# Altium PCB OptoGrid_uLEDArray_V0.05.pcbdoc (part 2 of 2)
Units mil, origin at the board's own origin, x right, y up, seen from the top; angles counter-clockwise.
Board outline 861.98 x 813.48 mil, 2 copper layers (Top Layer, Bottom Layer); 65 components, 16 nets, 148 pads, 64 vias.
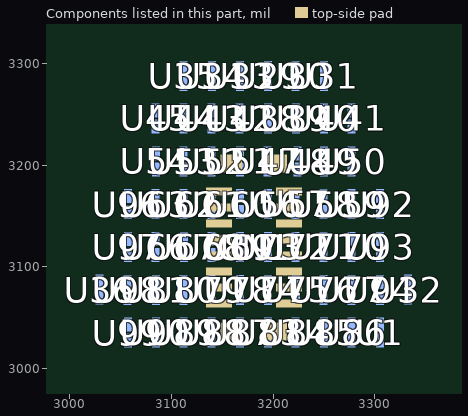
[diagram p2: the components of this part, seen from the top]

## Other copper (continued)
Bottom Layer:
  region net Y8: 3303.47,3051.4 3306.47,3051.4 ccw(c3312.1,3051.4) 3308.72,3046.9 3306.47,3046.9 3303.47,3046.9 3301.22,3046.9 ccw(c3297.85,3051.4)
  region net X8: 3296.24,3025.72 3296.24,3028.72 ccw(c3295.79,3030.97) 3298.08,3030.97 3298.08,3028.72 3298.08,3025.72 3298.08,3023.47 ccw(c3295.79,3023.47)
  region net X8: 3311.87,3028.69 3311.87,3025.69 ccw(c3564.99,3023.44) 3311.86,3023.44 3311.86,3025.69 3311.86,3028.69 3311.86,3030.94 ccw(c3564.99,3030.94)
  region net Y6: 3129.38,3078.17 3130.32,3083.35 ccw(c3123.69,3089.98) 3132.68,3087.35 3132.68,3085.72 3132.68,3081.48 3132.68,3081.23 ccw(c3169.67,3037.88)
  region net Y6: 3148.05,3083.53 3147.71,3079.64 ccw(c3142.93,3073.27) 3142.93,3081.23 3146.12,3081.23 3146.46,3085.12 3146.46,3088.3 ccw(c3154.42,3088.3)
  region net X3: 3141.07,3060.98 3138.07,3060.98 ccw(c3132.45,3060.98) 3135.82,3065.48 3138.07,3065.48 3141.07,3065.48 3143.32,3065.48 ccw(c3146.7,3060.98)
  region net Y6: 3160.43,3074.03 3162.98,3075.72 ccw(c3169.61,3082.34) 3166.98,3073.35 3165.35,3073.35 3161.11,3073.35 3160.28,3073.35 ccw(c3160.14,3073.74)
  region net Y6: 3178.56,3070.91 3178.56,3067.91 ccw(c3178.56,3062.28) 3174.06,3065.66 3174.06,3067.91 3174.06,3070.91 3174.06,3073.16 ccw(c3178.56,3076.53)
  region net Y6: 3095.96,3070.91 3095.96,3067.91 ccw(c3095.96,3062.28) 3091.46,3065.66 3091.46,3067.91 3091.46,3070.91 3091.46,3073.16 ccw(c3095.96,3076.53)
  region net Y6: 3100.58,3067.91 3100.58,3070.91 ccw(c3100.58,3076.53) 3105.08,3073.16 3105.08,3070.91 3105.08,3067.91 3105.08,3065.66 ccw(c3100.58,3062.28)
  region net Y6: 3122.77,3075.81 3120.96,3069.75 ccw(c3126.15,3064.56) 3118.86,3065.48 3118.86,3071.9 3118.86,3073.35 ccw(c3115.43,3083.15)
  region net Y6: 3120.96,3069.09 3121.73,3064.07 ccw(c3118.23,3060.57) 3118.86,3065.48 3118.86,3066.94 3118.86,3073.35 ccw(c3126.17,3074.29)
  region net X2: 3104.53,3093.87 3111.95,3090.69 ccw(c3116.72,3097.06) 3116.72,3089.1 3109.3,3089.1 3106.12,3089.1 ccw(c3100.55,3089.9)
  region net Y6: 3183.38,3067.91 3183.38,3070.91 ccw(c3183.38,3076.53) 3187.88,3073.16 3187.88,3070.91 3187.88,3067.91 3187.88,3065.66 ccw(c3183.38,3062.28)
  region net Y6: 3206.16,3070.89 3206.16,3067.89 ccw(c3206.16,3062.26) 3201.66,3065.64 3201.66,3067.89 3201.66,3070.89 3201.66,3073.14 ccw(c3206.16,3076.51)
  region net Y6: 3233.75,3086.62 3233.78,3083.61 ccw(c3233.74,3077.99) 3229.26,3081.39 3229.26,3083.64 3229.26,3086.64 3229.26,3088.89 ccw(c3233.79,3092.24)
  region net Y6: 3211,3083.77 3210.97,3086.77 ccw(c3211.01,3092.4) 3215.48,3088.99 3215.48,3086.74 3215.48,3083.74 3215.48,3081.49 ccw(c3210.96,3078.14)
  region net X6: 3223.87,3060.98 3220.87,3060.98 ccw(c3215.25,3060.98) 3218.62,3065.48 3220.87,3065.48 3223.87,3065.48 3226.12,3065.48 ccw(c3229.5,3060.98)
  region net Y5: 3095.76,3113 3095.76,3110 ccw(c3095.77,3104.37) 3091.26,3107.74 3091.26,3109.99 3091.26,3112.99 3091.26,3115.24 ccw(c3095.76,3118.62)
  region net Y5: 3100.78,3110 3100.78,3113 ccw(c3100.78,3118.62) 3105.28,3115.25 3105.28,3113 3105.28,3110 3105.28,3107.75 ccw(c3100.79,3104.37)
  region net Y5: 3123.56,3113.01 3123.56,3110.01 ccw(c3123.57,3104.39) 3119.06,3107.76 3119.06,3110.01 3119.06,3113.01 3119.06,3115.26 ccw(c3123.56,3118.64)
  region net Y5: 3128.18,3110.01 3128.18,3113.01 ccw(c3128.18,3118.64) 3132.68,3115.26 3132.68,3113.01 3132.68,3110.01 3132.68,3107.76 ccw(c3128.19,3104.39)
  region net Y5: 3150.96,3113.02 3150.96,3110.02 ccw(c3150.97,3104.4) 3146.46,3107.77 3146.46,3110.02 3146.46,3113.02 3146.46,3115.27 ccw(c3150.96,3118.65)
  region net X3: 3138.07,3135.8 3141.07,3135.8 ccw(c3146.7,3135.8) 3143.32,3131.3 3141.07,3131.3 3138.07,3131.3 3135.82,3131.3 ccw(c3132.45,3135.8)
  region net Y5: 3155.78,3110.03 3155.78,3113.03 ccw(c3155.78,3118.65) 3160.28,3115.28 3160.28,3113.03 3160.28,3110.03 3160.28,3107.78 ccw(c3155.79,3104.4)
  region net Y5: 3178.56,3113.04 3178.56,3110.04 ccw(c3178.57,3104.41) 3174.06,3107.79 3174.06,3110.04 3174.06,3113.04 3174.06,3115.29 ccw(c3178.56,3118.66)
  region net Y5: 3183.38,3110.04 3183.38,3113.04 ccw(c3183.38,3118.67) 3187.88,3115.29 3187.88,3113.04 3187.88,3110.04 3187.88,3107.79 ccw(c3183.39,3104.42)
  region net Y5: 3206.16,3113.05 3206.16,3110.05 ccw(c3206.17,3104.43) 3201.66,3107.8 3201.66,3110.05 3201.66,3113.05 3201.66,3115.3 ccw(c3206.16,3118.68)
  region net Y5: 3215.17,3110.06 3215.17,3113.06 ccw(c3192.38,3115.31) 3215.28,3115.31 3215.28,3113.06 3215.28,3110.06 3215.28,3107.81 ccw(c3192.06,3107.81)
  region net Y5: 3233.56,3113.07 3233.56,3110.07 ccw(c3233.57,3104.44) 3229.06,3107.81 3229.06,3110.06 3229.06,3113.06 3229.06,3115.31 ccw(c3233.56,3118.69)
  region net X6: 3220.67,3135.8 3223.67,3135.8 ccw(c3229.3,3135.8) 3225.92,3131.3 3223.67,3131.3 3220.67,3131.3 3218.42,3131.3 ccw(c3215.05,3135.8)
  region net Y5: 3265.98,3110.08 3265.98,3113.08 ccw(c3265.98,3118.71) 3270.48,3115.34 3270.48,3113.09 3270.48,3110.09 3270.48,3107.84 ccw(c3265.99,3104.46)
  region net Y5: 3238.38,3110.07 3238.38,3113.07 ccw(c3238.38,3118.69) 3242.88,3115.32 3242.88,3113.07 3242.88,3110.07 3242.88,3107.82 ccw(c3238.39,3104.44)
  region net Y5: 3261.16,3113.08 3261.16,3110.08 ccw(c3261.17,3104.46) 3256.66,3107.83 3256.66,3110.08 3256.66,3113.08 3256.66,3115.33 ccw(c3261.16,3118.71)
  region net Y4: 3095.84,3155.21 3095.87,3152.21 ccw(c3095.83,3146.58) 3091.35,3149.99 3091.35,3152.24 3091.35,3155.24 3091.35,3157.49 ccw(c3095.88,3160.83)
  region net X1: 3084.75,3174.9 3092.71,3178.2 ccw(c3096.54,3174.08) 3090.95,3173.49 3087.64,3173.49 3079.93,3173.49 ccw(c3079.93,3182.45)
  region net Y4: 3100.6,3152.17 3100.57,3155.17 ccw(c3100.61,3160.8) 3105.08,3157.39 3105.08,3155.14 3105.08,3152.14 3105.08,3149.89 ccw(c3100.56,3146.55)
  region net Y4: 3119.11,3159.14 3120.45,3156.25 ccw(c3126.82,3151.48) 3118.86,3151.48 3118.86,3154.66 3117.52,3157.55 3114.33,3157.55 ccw(c3114.33,3165.51)
  region net Y4: 3150.96,3170.87 3150.96,3167.87 ccw(c3150.96,3162.24) 3146.46,3165.62 3146.46,3167.87 3146.46,3170.87 3146.46,3173.12 ccw(c3150.96,3176.49)
  region net Y4: 3131.47,3167.89 3131.47,3170.89 ccw(c3129.99,3173.14) 3132.68,3173.14 3132.68,3170.89 3132.68,3167.89 3132.68,3165.64 ccw(c3129.99,3165.64)
  region net X3: 3141.07,3145.18 3138.07,3145.18 ccw(c3132.45,3145.18) 3135.82,3149.68 3138.07,3149.68 3141.07,3149.68 3143.32,3149.68 ccw(c3146.7,3145.18)
  region net Y3: 3095.96,3197.31 3095.96,3194.31 ccw(c3095.96,3188.68) 3091.46,3192.06 3091.46,3194.31 3091.46,3197.31 3091.46,3199.56 ccw(c3095.96,3202.93)
  region net Y3: 3100.58,3194.31 3100.58,3197.31 ccw(c3100.58,3202.93) 3105.08,3199.56 3105.08,3197.31 3105.08,3194.31 3105.08,3192.06 ccw(c3100.58,3188.68)
  region net Y3: 3123.36,3197.31 3123.36,3194.31 ccw(c3123.36,3188.68) 3118.86,3192.06 3118.86,3194.31 3118.86,3197.31 3118.86,3199.56 ccw(c3123.36,3202.93)
  region net Y3: 3150.85,3197.31 3150.85,3194.31 ccw(c3150.85,3188.68) 3146.35,3192.06 3146.35,3194.31 3146.35,3197.31 3146.35,3199.56 ccw(c3150.85,3202.93)
  region net Y3: 3128.07,3194.31 3128.07,3197.31 ccw(c3128.07,3202.93) 3132.57,3199.56 3132.57,3197.31 3132.57,3194.31 3132.57,3192.06 ccw(c3128.07,3188.68)
  region net Y1: 3107.52,3273.71 3102.18,3272.62 ccw(c3083.89,3290.91) 3105.08,3276.08 3105.64,3276.08 3109.88,3276.08 3111.51,3276.08 ccw(c3114.14,3267.09)
  region net Y1: 3123.36,3281.51 3123.36,3278.51 ccw(c3123.36,3272.88) 3118.86,3276.26 3118.86,3278.51 3118.86,3281.51 3118.86,3283.76 ccw(c3123.36,3287.13)
  region net Y1: 3128.25,3278.51 3128.25,3281.51 ccw(c3128.25,3287.13) 3132.75,3283.76 3132.75,3281.51 3132.75,3278.51 3132.75,3276.26 ccw(c3128.25,3272.88)
  region net Y1: 3151.03,3281.51 3151.03,3278.51 ccw(c3151.03,3272.88) 3146.53,3276.26 3146.53,3278.51 3146.53,3281.51 3146.53,3283.76 ccw(c3151.03,3287.13)
  region net Y1: 3178.58,3281.51 3178.58,3278.51 ccw(c3178.58,3272.88) 3174.08,3276.26 3174.08,3278.51 3174.08,3281.51 3174.08,3283.76 ccw(c3178.58,3287.13)
  region net Y1: 3155.8,3278.51 3155.8,3281.51 ccw(c3155.8,3287.13) 3160.3,3283.76 3160.3,3281.51 3160.3,3278.51 3160.3,3276.26 ccw(c3155.8,3272.88)
  region net Y1: 3183.36,3278.51 3183.36,3281.51 ccw(c3183.36,3287.13) 3187.86,3283.76 3187.86,3281.51 3187.86,3278.51 3187.86,3276.26 ccw(c3183.36,3272.88)
  region net Y1: 3206.14,3281.51 3206.14,3278.51 ccw(c3206.14,3272.88) 3201.64,3276.26 3201.64,3278.51 3201.64,3281.51 3201.64,3283.76 ccw(c3206.14,3287.13)
  region net Y1: 3210.84,3278.51 3210.84,3281.51 ccw(c3210.84,3287.13) 3215.34,3283.76 3215.34,3281.51 3215.34,3278.51 3215.34,3276.26 ccw(c3210.84,3272.88)
  region net Y1: 3233.62,3281.51 3233.62,3278.51 ccw(c3233.62,3272.88) 3229.12,3276.26 3229.12,3278.51 3229.12,3281.51 3229.12,3283.76 ccw(c3233.62,3287.13)
  region net Y1: 3238.58,3278.51 3238.58,3281.51 ccw(c3238.58,3287.13) 3243.08,3283.76 3243.08,3281.51 3243.08,3278.51 3243.08,3276.26 ccw(c3238.58,3272.88)
  region net Y2: 3095.86,3239.51 3095.86,3236.51 ccw(c3095.86,3230.88) 3091.36,3234.26 3091.36,3236.51 3091.36,3239.51 3091.36,3241.76 ccw(c3095.86,3245.13)
  region net Y2: 3100.58,3236.51 3100.58,3239.51 ccw(c3100.58,3245.13) 3105.08,3241.76 3105.08,3239.51 3105.08,3236.51 3105.08,3234.26 ccw(c3100.58,3230.88)
  region net Y2: 3123.36,3239.51 3123.36,3236.51 ccw(c3123.36,3230.88) 3118.86,3234.26 3118.86,3236.51 3118.86,3239.51 3118.86,3241.76 ccw(c3123.36,3245.13)
  region net Y2: 3128.08,3236.51 3128.08,3239.51 ccw(c3128.08,3245.13) 3132.58,3241.76 3132.58,3239.51 3132.58,3236.51 3132.58,3234.26 ccw(c3128.08,3230.88)
  region net Y2: 3150.86,3239.51 3150.86,3236.51 ccw(c3150.86,3230.88) 3146.36,3234.26 3146.36,3236.51 3146.36,3239.51 3146.36,3241.76 ccw(c3150.86,3245.13)
  region net Y2: 3178.36,3239.51 3178.36,3236.51 ccw(c3178.36,3230.88) 3173.86,3234.26 3173.86,3236.51 3173.86,3239.51 3173.86,3241.76 ccw(c3178.36,3245.13)
  region net Y2: 3155.58,3236.51 3155.58,3239.51 ccw(c3155.58,3245.13) 3160.08,3241.76 3160.08,3239.51 3160.08,3236.51 3160.08,3234.26 ccw(c3155.58,3230.88)
  region net Y2: 3183.38,3236.51 3183.38,3239.51 ccw(c3183.38,3245.13) 3187.88,3241.76 3187.88,3239.51 3187.88,3236.51 3187.88,3234.26 ccw(c3183.38,3230.88)
  region net Y2: 3206.16,3239.51 3206.16,3236.51 ccw(c3206.16,3230.88) 3201.66,3234.26 3201.66,3236.51 3201.66,3239.51 3201.66,3241.76 ccw(c3206.16,3245.13)
  region net Y2: 3238.58,3236.51 3238.58,3239.51 ccw(c3238.58,3245.13) 3243.08,3241.76 3243.08,3239.51 3243.08,3236.51 3243.08,3234.26 ccw(c3238.58,3230.88)
  region net Y2: 3261.36,3239.51 3261.36,3236.51 ccw(c3261.36,3230.88) 3256.86,3234.26 3256.86,3236.51 3256.86,3239.51 3256.86,3241.76 ccw(c3261.36,3245.13)
  region net Y2: 3210.98,3236.51 3210.98,3239.51 ccw(c3210.98,3245.13) 3215.48,3241.76 3215.48,3239.51 3215.48,3236.51 3215.48,3234.26 ccw(c3210.98,3230.88)
  region net Y2: 3233.76,3239.51 3233.76,3236.51 ccw(c3233.76,3230.88) 3229.26,3234.26 3229.26,3236.51 3229.26,3239.51 3229.26,3241.76 ccw(c3233.76,3245.13)
  region net X6: 3226.56,3260.07 3232.03,3261.3 ccw(c3244.47,3248.86) 3229.26,3257.7 3228.44,3257.7 3224.19,3257.7 3222.56,3257.7 ccw(c3219.94,3266.69)
  region net Y2: 3265.98,3236.51 3265.98,3239.51 ccw(c3265.98,3245.13) 3270.48,3241.76 3270.48,3239.51 3270.48,3236.51 3270.48,3234.26 ccw(c3265.98,3230.88)
  region net Y3: 3155.78,3194.31 3155.78,3197.31 ccw(c3155.78,3202.93) 3160.28,3199.56 3160.28,3197.31 3160.28,3194.31 3160.28,3192.06 ccw(c3155.78,3188.68)
  region net Y3: 3178.56,3197.31 3178.56,3194.31 ccw(c3178.56,3188.68) 3174.06,3192.06 3174.06,3194.31 3174.06,3197.31 3174.06,3199.56 ccw(c3178.56,3202.93)
  region net X4: 3165.79,3220 3168.79,3220 ccw(c3174.42,3220) 3171.04,3215.5 3168.79,3215.5 3165.79,3215.5 3163.54,3215.5 ccw(c3160.17,3220)
  region net Y3: 3183.07,3194.31 3183.07,3197.31 ccw(c3183.07,3202.93) 3187.57,3199.56 3187.57,3197.31 3187.57,3194.31 3187.57,3192.06 ccw(c3183.07,3188.68)
  region net Y3: 3205.85,3197.31 3205.85,3194.31 ccw(c3205.85,3188.68) 3201.35,3192.06 3201.35,3194.31 3201.35,3197.31 3201.35,3199.56 ccw(c3205.85,3202.93)
  region net Y3: 3235.37,3197.31 3235.37,3194.31 ccw(c3235.37,3188.68) 3230.87,3192.06 3230.87,3194.31 3230.87,3197.31 3230.87,3199.56 ccw(c3235.37,3202.93)
  region net Y3: 3212.59,3194.31 3212.59,3197.31 ccw(c3212.59,3202.93) 3217.09,3199.56 3217.09,3197.31 3217.09,3194.31 3217.09,3192.06 ccw(c3212.59,3188.68)
  region net Y3: 3238.47,3194.31 3238.47,3197.31 ccw(c3238.47,3202.93) 3242.97,3199.56 3242.97,3197.31 3242.97,3194.31 3242.97,3192.06 ccw(c3238.47,3188.68)
  region net Y3: 3261.25,3197.31 3261.25,3194.31 ccw(c3261.25,3188.68) 3256.75,3192.06 3256.75,3194.31 3256.75,3197.31 3256.75,3199.56 ccw(c3261.25,3202.93)
  region net Y3: 3265.98,3194.31 3265.98,3197.31 ccw(c3265.98,3202.93) 3270.48,3199.56 3270.48,3197.31 3270.48,3194.31 3270.48,3192.06 ccw(c3265.98,3188.68)
  region net Y4: 3155.78,3167.87 3155.78,3170.87 ccw(c3155.78,3176.49) 3160.28,3173.12 3160.28,3170.87 3160.28,3167.87 3160.28,3165.62 ccw(c3155.78,3162.24)
  region net X4: 3176.1,3155.12 3176.1,3152.12 ccw(c3176.32,3149.87) 3174.06,3149.87 3174.06,3152.12 3174.06,3155.12 3174.06,3157.37 ccw(c3176.32,3157.37)
  region net Y4: 3233.55,3171.01 3233.58,3168.01 ccw(c3233.54,3162.38) 3229.06,3165.79 3229.06,3168.04 3229.06,3171.04 3229.06,3173.29 ccw(c3233.59,3176.63)
  region net Y4: 3210.8,3168.18 3210.77,3171.18 ccw(c3210.81,3176.81) 3215.28,3173.4 3215.28,3171.15 3215.28,3168.15 3215.28,3165.9 ccw(c3210.76,3162.56)
  region net X6: 3223.67,3145.38 3220.67,3145.38 ccw(c3215.05,3145.38) 3218.42,3149.88 3220.67,3149.88 3223.67,3149.88 3225.92,3149.88 ccw(c3229.3,3145.38)
  region net Y4: 3238.4,3167.97 3238.37,3170.97 ccw(c3238.41,3176.6) 3242.88,3173.19 3242.88,3170.94 3242.88,3167.94 3242.88,3165.69 ccw(c3238.36,3162.35)
  region net Y4: 3261.16,3170.89 3261.16,3167.89 ccw(c3261.16,3162.26) 3256.66,3165.64 3256.66,3167.89 3256.66,3170.89 3256.66,3173.14 ccw(c3261.16,3176.51)
  region net Y4: 3266,3152.17 3265.97,3155.17 ccw(c3266.01,3160.8) 3270.48,3157.39 3270.48,3155.14 3270.48,3152.14 3270.48,3149.89 ccw(c3265.96,3146.55)
  region net Y4: 3196.27,3149.49 3193.27,3149.49 ccw(c3191.02,3136.19) 3191.02,3149.68 3193.27,3149.68 3196.27,3149.68 3198.52,3149.68 ccw(c3198.52,3136.19)
  region net Y4: 3200.71,3159.14 3203.25,3157.45 ccw(c3209.62,3152.68) 3201.66,3152.68 3201.66,3155.86 3199.12,3157.55 3195.93,3157.55 ccw(c3195.93,3165.51)
  region net X5: 3191.23,3177.24 3194.23,3177.24 ccw(c3198.81,3177.24) 3196.48,3173.3 3194.23,3173.3 3191.23,3173.3 3188.98,3173.3 ccw(c3186.65,3177.24)
  region net Y6: 3238.38,3067.89 3238.38,3070.89 ccw(c3238.38,3076.51) 3242.88,3073.14 3242.88,3070.89 3242.88,3067.89 3242.88,3065.64 ccw(c3238.38,3062.26)
  region net Y6: 3261.16,3070.91 3261.16,3067.91 ccw(c3261.16,3062.28) 3256.66,3065.66 3256.66,3067.91 3256.66,3070.91 3256.66,3073.16 ccw(c3261.16,3076.53)
  region net Y6: 3265.98,3067.91 3265.98,3070.91 ccw(c3265.98,3076.53) 3270.48,3073.16 3270.48,3070.91 3270.48,3067.91 3270.48,3065.66 ccw(c3265.98,3062.28)
  region net Y7: 3095.96,3028.91 3095.96,3025.91 ccw(c3095.96,3020.28) 3091.46,3023.66 3091.46,3025.91 3091.46,3028.91 3091.46,3031.16 ccw(c3095.96,3034.53)
  region net X1: 3078.44,3037.64 3076.09,3039.53 ccw(c3069.73,3044.3) 3077.68,3044.3 3077.68,3041.12 3080.03,3039.23 3083.21,3039.23 ccw(c3083.21,3031.27)
  region net Y7: 3100.58,3025.91 3100.58,3028.91 ccw(c3100.58,3034.53) 3105.08,3031.16 3105.08,3028.91 3105.08,3025.91 3105.08,3023.66 ccw(c3100.58,3020.28)
  region net Y7: 3123.36,3028.91 3123.36,3025.91 ccw(c3123.36,3020.28) 3118.86,3023.66 3118.86,3025.91 3118.86,3028.91 3118.86,3031.16 ccw(c3123.36,3034.53)
  region net Y7: 3150.96,3028.91 3150.96,3025.91 ccw(c3150.96,3020.28) 3146.46,3023.66 3146.46,3025.91 3146.46,3028.91 3146.46,3031.16 ccw(c3150.96,3034.53)
  region net Y7: 3128.18,3025.91 3128.18,3028.91 ccw(c3128.18,3034.53) 3132.68,3031.16 3132.68,3028.91 3132.68,3025.91 3132.68,3023.66 ccw(c3128.18,3020.28)
  region net X3: 3138.07,3051.6 3141.07,3051.6 ccw(c3146.7,3051.6) 3143.32,3047.1 3141.07,3047.1 3138.07,3047.1 3135.82,3047.1 ccw(c3132.45,3051.6)
  region net Y7: 3155.78,3025.91 3155.78,3028.91 ccw(c3155.78,3034.53) 3160.28,3031.16 3160.28,3028.91 3160.28,3025.91 3160.28,3023.66 ccw(c3155.78,3020.28)
  region net Y7: 3178.56,3028.91 3178.56,3025.91 ccw(c3178.56,3020.28) 3174.06,3023.66 3174.06,3025.91 3174.06,3028.91 3174.06,3031.16 ccw(c3178.56,3034.53)
  region net Y7: 3157.86,3029.42 3156.97,3034.4 ccw(c3257.82,3140.59) 3160.28,3031.35 3160.28,3031.26 3160.28,3027.12 3160.28,3025.44 ccw(c3151.72,3022.96)
  region net Y7: 3183.38,3025.91 3183.38,3028.91 ccw(c3183.38,3034.53) 3187.88,3031.16 3187.88,3028.91 3187.88,3025.91 3187.88,3023.66 ccw(c3183.38,3020.28)
  region net Y7: 3206.16,3028.91 3206.16,3025.91 ccw(c3206.16,3020.28) 3201.66,3023.66 3201.66,3025.91 3201.66,3028.91 3201.66,3031.16 ccw(c3206.16,3034.53)
  region net Y7: 3210.78,3025.91 3210.78,3028.91 ccw(c3210.78,3034.53) 3215.28,3031.16 3215.28,3028.91 3215.28,3025.91 3215.28,3023.66 ccw(c3210.78,3020.28)
  region net Y7: 3233.56,3028.91 3233.56,3025.91 ccw(c3233.56,3020.28) 3229.06,3023.66 3229.06,3025.91 3229.06,3028.91 3229.06,3031.16 ccw(c3233.56,3034.53)
  region net X6: 3220.87,3051.6 3223.87,3051.6 ccw(c3229.5,3051.6) 3226.12,3047.1 3223.87,3047.1 3220.87,3047.1 3218.62,3047.1 ccw(c3215.25,3051.6)
  region net Y7: 3238.58,3025.91 3238.58,3028.91 ccw(c3238.58,3034.53) 3243.08,3031.16 3243.08,3028.91 3243.08,3025.91 3243.08,3023.66 ccw(c3238.58,3020.28)
  region net Y7: 3261.36,3028.91 3261.36,3025.91 ccw(c3261.36,3020.28) 3256.86,3023.66 3256.86,3025.91 3256.86,3028.91 3256.86,3031.16 ccw(c3261.36,3034.53)
  region net X7: 3254.16,3049.47 3259.63,3050.7 ccw(c3272.07,3038.26) 3256.86,3047.1 3256.04,3047.1 3251.79,3047.1 3250.16,3047.1 ccw(c3247.54,3056.09)
  region net Y7: 3265.98,3025.91 3265.98,3028.91 ccw(c3265.98,3034.53) 3270.48,3031.16 3270.48,3028.91 3270.48,3025.91 3270.48,3023.66 ccw(c3265.98,3020.28)
  region net X8: 3285.85,3039.73 3283.71,3037.64 ccw(c3278.93,3031.27) 3278.93,3039.23 3282.12,3039.23 3284.26,3041.32 3284.26,3044.5 ccw(c3292.22,3044.5)
  region net X1: 3030.87,3060.98 3027.87,3060.98 ccw(c3022.25,3060.98) 3025.62,3065.48 3027.87,3065.48 3030.87,3065.48 3033.12,3065.48 ccw(c3036.5,3060.98)
  region net X8: 3334.15,3060.96 3331.15,3061 ccw(c3325.53,3060.95) 3328.86,3065.48 3331.11,3065.48 3334.11,3065.48 3336.36,3065.48 ccw(c3339.78,3061.01)
  region net Y8: 3306.47,3060.98 3303.47,3060.98 ccw(c3297.85,3060.98) 3301.22,3065.48 3303.47,3065.48 3306.47,3065.48 3308.72,3065.48 ccw(c3312.1,3060.98)
  region net Y8: 3315.73,3075.59 3314.05,3069.66 ccw(c3319.61,3064.1) 3311.86,3065.48 3311.86,3071.72 3311.86,3073.35 ccw(c3309.62,3081.7)
  region net X7: 3298.04,3083.66 3298.04,3086.66 ccw(c3234.78,3088.91) 3298.08,3088.91 3298.08,3086.66 3298.08,3083.66 3298.08,3081.41 ccw(c3234.78,3081.41)
  region net Y8: 3303.47,3135.8 3306.47,3135.8 ccw(c3312.1,3135.8) 3308.72,3131.3 3306.47,3131.3 3303.47,3131.3 3301.22,3131.3 ccw(c3297.85,3135.8)
  region net Y8: 3314.6,3128.89 3314.6,3125.89 ccw(c3314.6,3123.1) 3311.86,3123.64 3311.86,3125.89 3311.86,3128.89 3311.86,3131.14 ccw(c3314.6,3131.68)
  region net X6: 3295.72,3113.96 3295.72,3116.96 ccw(c3298.08,3118.25) 3298.08,3115.55 3298.08,3113.96 3298.08,3111.71 ccw(c3295.72,3111.59)
  region net Y8: 3306.47,3145.18 3303.47,3145.18 ccw(c3297.85,3145.18) 3301.22,3149.68 3303.47,3149.68 3306.47,3149.68 3308.72,3149.68 ccw(c3312.1,3145.18)
  region net X5: 3296.49,3174.61 3300.45,3174.89 ccw(c3305.23,3181.26) 3305.23,3173.3 3302.04,3173.3 3298.08,3173.02 3298.08,3169.84 ccw(c3290.13,3169.84)
  region net Y8: 3055.41,3051.42 3058.41,3051.38 ccw(c3064.03,3051.43) 3060.69,3046.9 3058.44,3046.9 3055.44,3046.9 3053.19,3046.9 ccw(c3049.78,3051.38)
  region net X1: 3046.99,3025.59 3046.96,3028.59 ccw(c3046.93,3031.92) 3050.08,3030.87 3050.08,3028.62 3050.08,3025.62 3050.08,3023.37 ccw(c3047.02,3022.37)
  region net X1: 3065.9,3028.72 3065.9,3025.72 ccw(c3066.12,3023.47) 3063.86,3023.47 3063.86,3025.72 3063.86,3028.72 3063.86,3030.97 ccw(c3066.12,3030.97)
  region net Y8: 3048.29,3072.25 3049.84,3074.94 ccw(c3054.61,3081.31) 3054.61,3073.35 3051.43,3073.35 3049.88,3070.66 3049.88,3067.47 ccw(c3041.93,3067.47)
  region net Y8: 3058.34,3060.96 3055.34,3061 ccw(c3049.71,3060.95) 3053.05,3065.48 3055.3,3065.48 3058.3,3065.48 3060.55,3065.48 ccw(c3063.96,3061)
  region net X2: 3059.8,3091.47 3065.67,3093.1 ccw(c3072.3,3086.47) 3063.31,3089.1 3061.68,3089.1 3057.44,3089.1 3055.81,3089.1 ccw(c3053.18,3098.09)
  region net Y8: 3058.47,3145.18 3055.47,3145.18 ccw(c3049.85,3145.18) 3053.22,3149.68 3055.47,3149.68 3058.47,3149.68 3060.72,3149.68 ccw(c3064.1,3145.18)
  region net X4: 3065.62,3170.89 3065.62,3167.89 ccw(c3066.18,3165.64) 3063.86,3165.64 3063.86,3167.89 3063.86,3170.89 3063.86,3173.14 ccw(c3066.18,3173.14)
  region net Y8: 3049.88,3125.89 3049.88,3128.89 ccw(c3037.51,3131.14) 3050.08,3131.14 3050.08,3128.89 3050.08,3125.89 3050.08,3123.64 ccw(c3037.51,3123.64)
  region net Y8: 3055.47,3135.8 3058.47,3135.8 ccw(c3064.1,3135.8) 3060.72,3131.3 3058.47,3131.3 3055.47,3131.3 3053.22,3131.3 ccw(c3049.85,3135.8)
  region net X3: 3065.77,3113.12 3065.77,3110.12 ccw(c3066.14,3107.87) 3063.86,3107.87 3063.86,3110.12 3063.86,3113.12 3063.86,3115.37 ccw(c3066.14,3115.37)
  region net X2: 3103.05,3095.35 3105.17,3097.47 3105.94,3096.9 3106.95,3096.45 3109.38,3095.8 3111.92,3095.34 3114.02,3094.87 3105.3,3086.59 3105.01,3088.09 3104.92,3089.35 3104.95,3091.41 3104.87,3092.33 3104.59,3093.25 3104.02,3094.24
  region net X6: 3233.43,3266.94 3235.56,3264.82 3234.39,3263.51 3233.33,3262.05 3231.53,3258.8 3230.1,3255.32 3229,3251.89 3220.5,3260.39 3223.94,3261.48 3227.41,3262.91 3230.66,3264.72 3232.12,3265.77
  region net X8: 3290.62,3034.96 3291.06,3030.28 3289.77,3031.43 3288.26,3032.54 3286.59,3033.57 3284.8,3034.49 3282.95,3035.25 3281.09,3035.82 3279.28,3036.18 3277.57,3036.27 3283.13,3046.95 3284.82,3044.08 3286.64,3040.77 3288.58,3037.55 3289.59,3036.14
  region net X1: 3096.11,3185.45 3098.16,3183.26 3096.94,3181.99 3095.83,3180.56 3093.91,3177.38 3092.35,3173.97 3091.13,3170.57 3082.95,3179.38 3086.42,3180.35 3089.94,3181.65 3093.26,3183.33 3094.76,3184.33
  region net X7: 3261.03,3056.34 3263.16,3054.22 3261.99,3052.91 3260.93,3051.45 3259.13,3048.2 3257.7,3044.72 3256.6,3041.28 3248.1,3049.79 3251.54,3050.88 3255.01,3052.31 3258.26,3054.12 3259.72,3055.17
  region net X4: 3168.79,3211.68 3165.79,3211.68 3165.64,3212.48 3165.24,3213.16 3163.96,3214.33 3162.46,3215.44 3161.79,3216.05 3161.28,3216.76 3173.3,3216.76 3172.79,3216.05 3172.12,3215.44 3170.62,3214.33 3169.34,3213.16 3168.94,3212.48
  region net X4: 3158.34,3218.62 3158.34,3221.62 3159.17,3221.77 3159.91,3222.16 3161.25,3223.45 3162.53,3224.95 3163.2,3225.61 3163.93,3226.13 3163.93,3214.1 3163.2,3214.62 3162.53,3215.29 3161.25,3216.78 3159.91,3218.07 3159.17,3218.47
  region net X5: 3199.3,3227.35 3201.42,3225.23 3200.98,3224.57 3200.81,3223.85 3201.01,3222.23 3201.41,3220.5 3201.48,3219.63 3201.36,3218.78 3192.86,3227.29 3193.7,3227.4 3194.57,3227.33 3196.3,3226.94 3197.92,3226.74 3198.65,3226.91
  region net X3: 3138.07,3061.57 3141.07,3058.69 3141.15,3056.46 3141.37,3054.64 3141.72,3053.1 3142.17,3051.71 3143.29,3048.82 3144.57,3044.91 3132.89,3047.79 3133.91,3049.08 3134.88,3050.63 3135.76,3052.39 3136.53,3054.27 3137.66,3058.11 3137.97,3059.92
  region net X6: 3220.87,3058.69 3223.87,3061.57 3223.98,3059.92 3224.29,3058.11 3225.42,3054.27 3226.19,3052.39 3227.07,3050.63 3228.03,3049.08 3229.06,3047.79 3217.38,3044.91 3218.66,3048.82 3219.78,3051.71 3220.23,3053.1 3220.57,3054.64 3220.79,3056.46
  region net X3: 3138.07,3144.5 3141.07,3144.5 3141.17,3142.75 3141.46,3140.97 3142.48,3137.39 3143.93,3133.93 3145.59,3130.72 3133.56,3130.72 3135.22,3133.93 3136.66,3137.39 3137.69,3140.97 3137.97,3142.75
  region net Y8: 3147.2,3102.05 3149.32,3104.17 3150.12,3103.54 3150.94,3103.19 3152.68,3102.97 3154.51,3102.89 3155.47,3102.71 3156.45,3102.34 3146.51,3095.57 3146.55,3096.35 3146.74,3097.21 3147.31,3099.02 3147.65,3100.72 3147.56,3101.45
  region net Y8: 3166.44,3101.6 3173.32,3098.6 3169.18,3098.43 3167.18,3098.16 3165.28,3097.7 3163.53,3097.01 3161.95,3096.04 3160.61,3094.75 3159.54,3093.1 3152.66,3103.03 3154.94,3103.17 3156.74,3103.11 3159.54,3102.58 3162.35,3101.92 3164.15,3101.69
  region net Y7: 3154.76,3040.73 3151.76,3040.73 3151.66,3042.48 3151.37,3044.27 3150.35,3047.84 3148.9,3051.3 3147.24,3054.51 3159.27,3054.51 3157.61,3051.3 3156.17,3047.84 3155.14,3044.27 3154.86,3042.48
  region net Y4: 3170.16,3143.75 3170.16,3140.75 3168.41,3140.65 3166.63,3140.36 3163.05,3139.34 3159.59,3137.9 3156.38,3136.24 3156.38,3148.27 3159.59,3146.61 3163.05,3145.16 3166.63,3144.14 3168.41,3143.85
  region net X1: 3107.38,3183.71 3110.98,3186.71 3112.54,3186.81 3114.25,3187.09 3117.9,3188 3121.54,3189.06 3124.76,3189.89 3121.16,3178.41 3119.89,3179.54 3118.35,3180.57 3116.63,3181.48 3114.78,3182.25 3112.87,3182.87 3110.96,3183.32 3109.11,3183.61
  region net Y1: 3179.47,3280.01 3182.47,3280.01 3182.57,3278.45 3182.86,3277.16 3183.31,3276.08 3183.88,3275.11 3185.33,3273.17 3186.99,3270.65 3174.96,3270.65 3176.62,3273.17 3178.06,3275.11 3178.64,3276.08 3179.09,3277.16 3179.37,3278.45
  region net Y2: 3222.37,3236.51 3222.37,3239.51 3223.89,3239.62 3225.23,3239.92 3226.43,3240.39 3227.55,3240.99 3229.74,3242.51 3232.2,3244.26 3233.04,3232.26 3230.17,3233.82 3227.88,3235.18 3226.75,3235.72 3225.51,3236.14 3224.08,3236.41
  region net Y2: 3249.97,3239.51 3249.97,3236.51 3248.25,3236.41 3246.77,3236.14 3245.47,3235.72 3244.26,3235.18 3241.84,3233.82 3238.91,3232.26 3239.75,3244.26 3242.26,3242.51 3244.59,3240.99 3245.79,3240.39 3247.06,3239.92 3248.44,3239.62
  region net Y3: 3222.26,3194.31 3222.26,3197.31 3223.89,3197.41 3225.34,3197.7 3226.67,3198.14 3227.91,3198.72 3230.37,3200.17 3233.12,3201.82 3233.12,3189.8 3230.37,3191.45 3227.91,3192.9 3226.67,3193.48 3225.34,3193.92 3223.89,3194.21
  region net Y3: 3249.86,3197.31 3249.86,3194.31 3248.27,3194.21 3246.91,3193.92 3245.73,3193.48 3244.63,3192.9 3242.46,3191.45 3239.85,3189.8 3239.85,3201.82 3242.46,3200.17 3244.63,3198.72 3245.73,3198.14 3246.91,3197.7 3248.27,3197.41
  region net X4: 3173.55,3048.04 3170.55,3048.04 3170.4,3048.78 3170,3049.31 3169.42,3049.71 3168.72,3050.03 3167.22,3050.68 3166.55,3051.15 3166.03,3051.8 3178.06,3051.8 3177.54,3051.15 3176.88,3050.68 3175.38,3050.03 3174.68,3049.71 3174.1,3049.31 3173.7,3048.78
  region net X5: 3191.23,3177.24 3194.23,3177.24 3194.38,3176.39 3194.77,3175.55 3196.06,3173.91 3197.56,3172.34 3198.74,3170.81 3186.71,3170.81 3187.9,3172.34 3189.39,3173.91 3190.68,3175.55 3191.08,3176.39
  region net Y5: 3222.17,3113.06 3222.17,3110.06 3221.44,3109.91 3220.93,3109.51 3220.56,3108.92 3220.27,3108.21 3219.67,3106.7 3219.23,3106.03 3218.6,3105.51 3218.47,3117.54 3219.13,3117.02 3219.59,3116.37 3220.22,3114.88 3220.52,3114.18 3220.9,3113.6 3221.43,3113.21
  region net Y5: 3197.97,3110.05 3198.09,3113.05 3199.85,3113.15 3201.64,3113.44 3205.19,3114.45 3208.64,3115.89 3211.87,3117.53 3211.76,3105.51 3208.57,3107.18 3205.09,3108.63 3201.5,3109.66 3199.72,3109.95
  region net Y6: 3123.96,3077 3134.11,3082.9 3130.8,3079.57 3129.36,3077.92 3128.2,3076.26 3127.43,3074.56 3127.14,3072.82 3127.21,3071.92 3127.44,3071 3127.84,3070.05 3128.43,3069.09 3115.92,3065.55 3116.2,3067.46 3116.76,3069.12 3117.58,3070.57 3118.6,3071.88 3121.1,3074.33
  region net X5: 3191.92,3047.55 3188.92,3047.55 3188.77,3048.31 3188.37,3048.9 3187.08,3049.78 3185.59,3050.61 3184.92,3051.13 3184.4,3051.8 3196.43,3051.8 3195.91,3051.13 3195.25,3050.61 3193.75,3049.78 3192.46,3048.9 3192.07,3048.31
  region net X6: 3295.72,3113.96 3295.72,3116.96 3297.37,3117.05 3298.66,3117.26 3300.66,3117.89 3302.65,3118.43 3303.94,3118.54 3305.58,3118.48 3298.85,3108.46 3298.44,3109.49 3298.2,3110.48 3297.91,3112.24 3297.69,3112.95 3297.31,3113.49 3296.68,3113.84
  region net X6: 3247.23,3264.39 3247.23,3267.39 3248.99,3267.49 3250.77,3267.78 3254.34,3268.8 3257.81,3270.25 3261.01,3271.9 3261.01,3259.88 3257.81,3261.53 3254.34,3262.98 3250.77,3264 3248.99,3264.29
  region net Y1: 3108.63,3279.07 3110.76,3276.95 3109.59,3275.64 3108.53,3274.18 3106.73,3270.93 3105.3,3267.45 3104.2,3264.01 3095.7,3272.52 3099.14,3273.61 3102.61,3275.04 3105.86,3276.85 3107.32,3277.9
  region net Y1: 3179.47,3269.51 ccw(c3164.47,3269.51) 3176.47,3278.51 3180.97,3280.01 3185.47,3278.51 ccw(c3197.47,3269.51) 3182.47,3269.51
  region net X5: 3292.92,3178.18 ccw(c3280.34,3165.61) 3284.82,3182.82 3286.55,3186.67 3289.83,3187.83 ccw(c3313.09,3198.35) 3295.04,3180.31
  region net X6: 3232.67,3140.73 ccw(c3232.67,3125.73) 3223.67,3137.73 3222.17,3141.49 3223.67,3146.73 ccw(c3232.67,3158.73) 3232.67,3143.73
  region net Y4: 3154.52,3158.87 cw(c3169.52,3158.87) 3157.52,3167.87 3153.57,3169.37 3148.52,3167.87 cw(c3136.52,3158.87) 3151.52,3158.87
  region net Y8: 3049.83,3102.05 ccw(c3057.19,3094.68) 3046.87,3096.09 3045.37,3099.72 3046.87,3106.34 ccw(c3050.11,3106.34) 3047.71,3104.17
  region net X3: 3129.07,3143.58 ccw(c3129.07,3158.58) 3138.07,3146.58 3139.57,3142.08 3138.07,3137.58 ccw(c3129.07,3125.58) 3129.07,3140.58

## Silkscreen, mask and mechanical layers (free items; w line width, h text height)
Mech6:
  drawing of 302 lines, arcs and shapes, not listed